# Altium PCB BugBusterMain.PcbDoc (part 3 of 6)
Units mm, origin at the board's own origin, x right, y up, seen from the top; angles counter-clockwise.
Board outline 110 x 80 mm, 6 copper layers (Top Layer, Inner Layer 1, Inner Layer 2, Inner Layer 3, Inner Layer 4, Bottom Layer), stack 1.546 mm thick; 244 components, 246 nets, 1173 pads, 1169 vias.
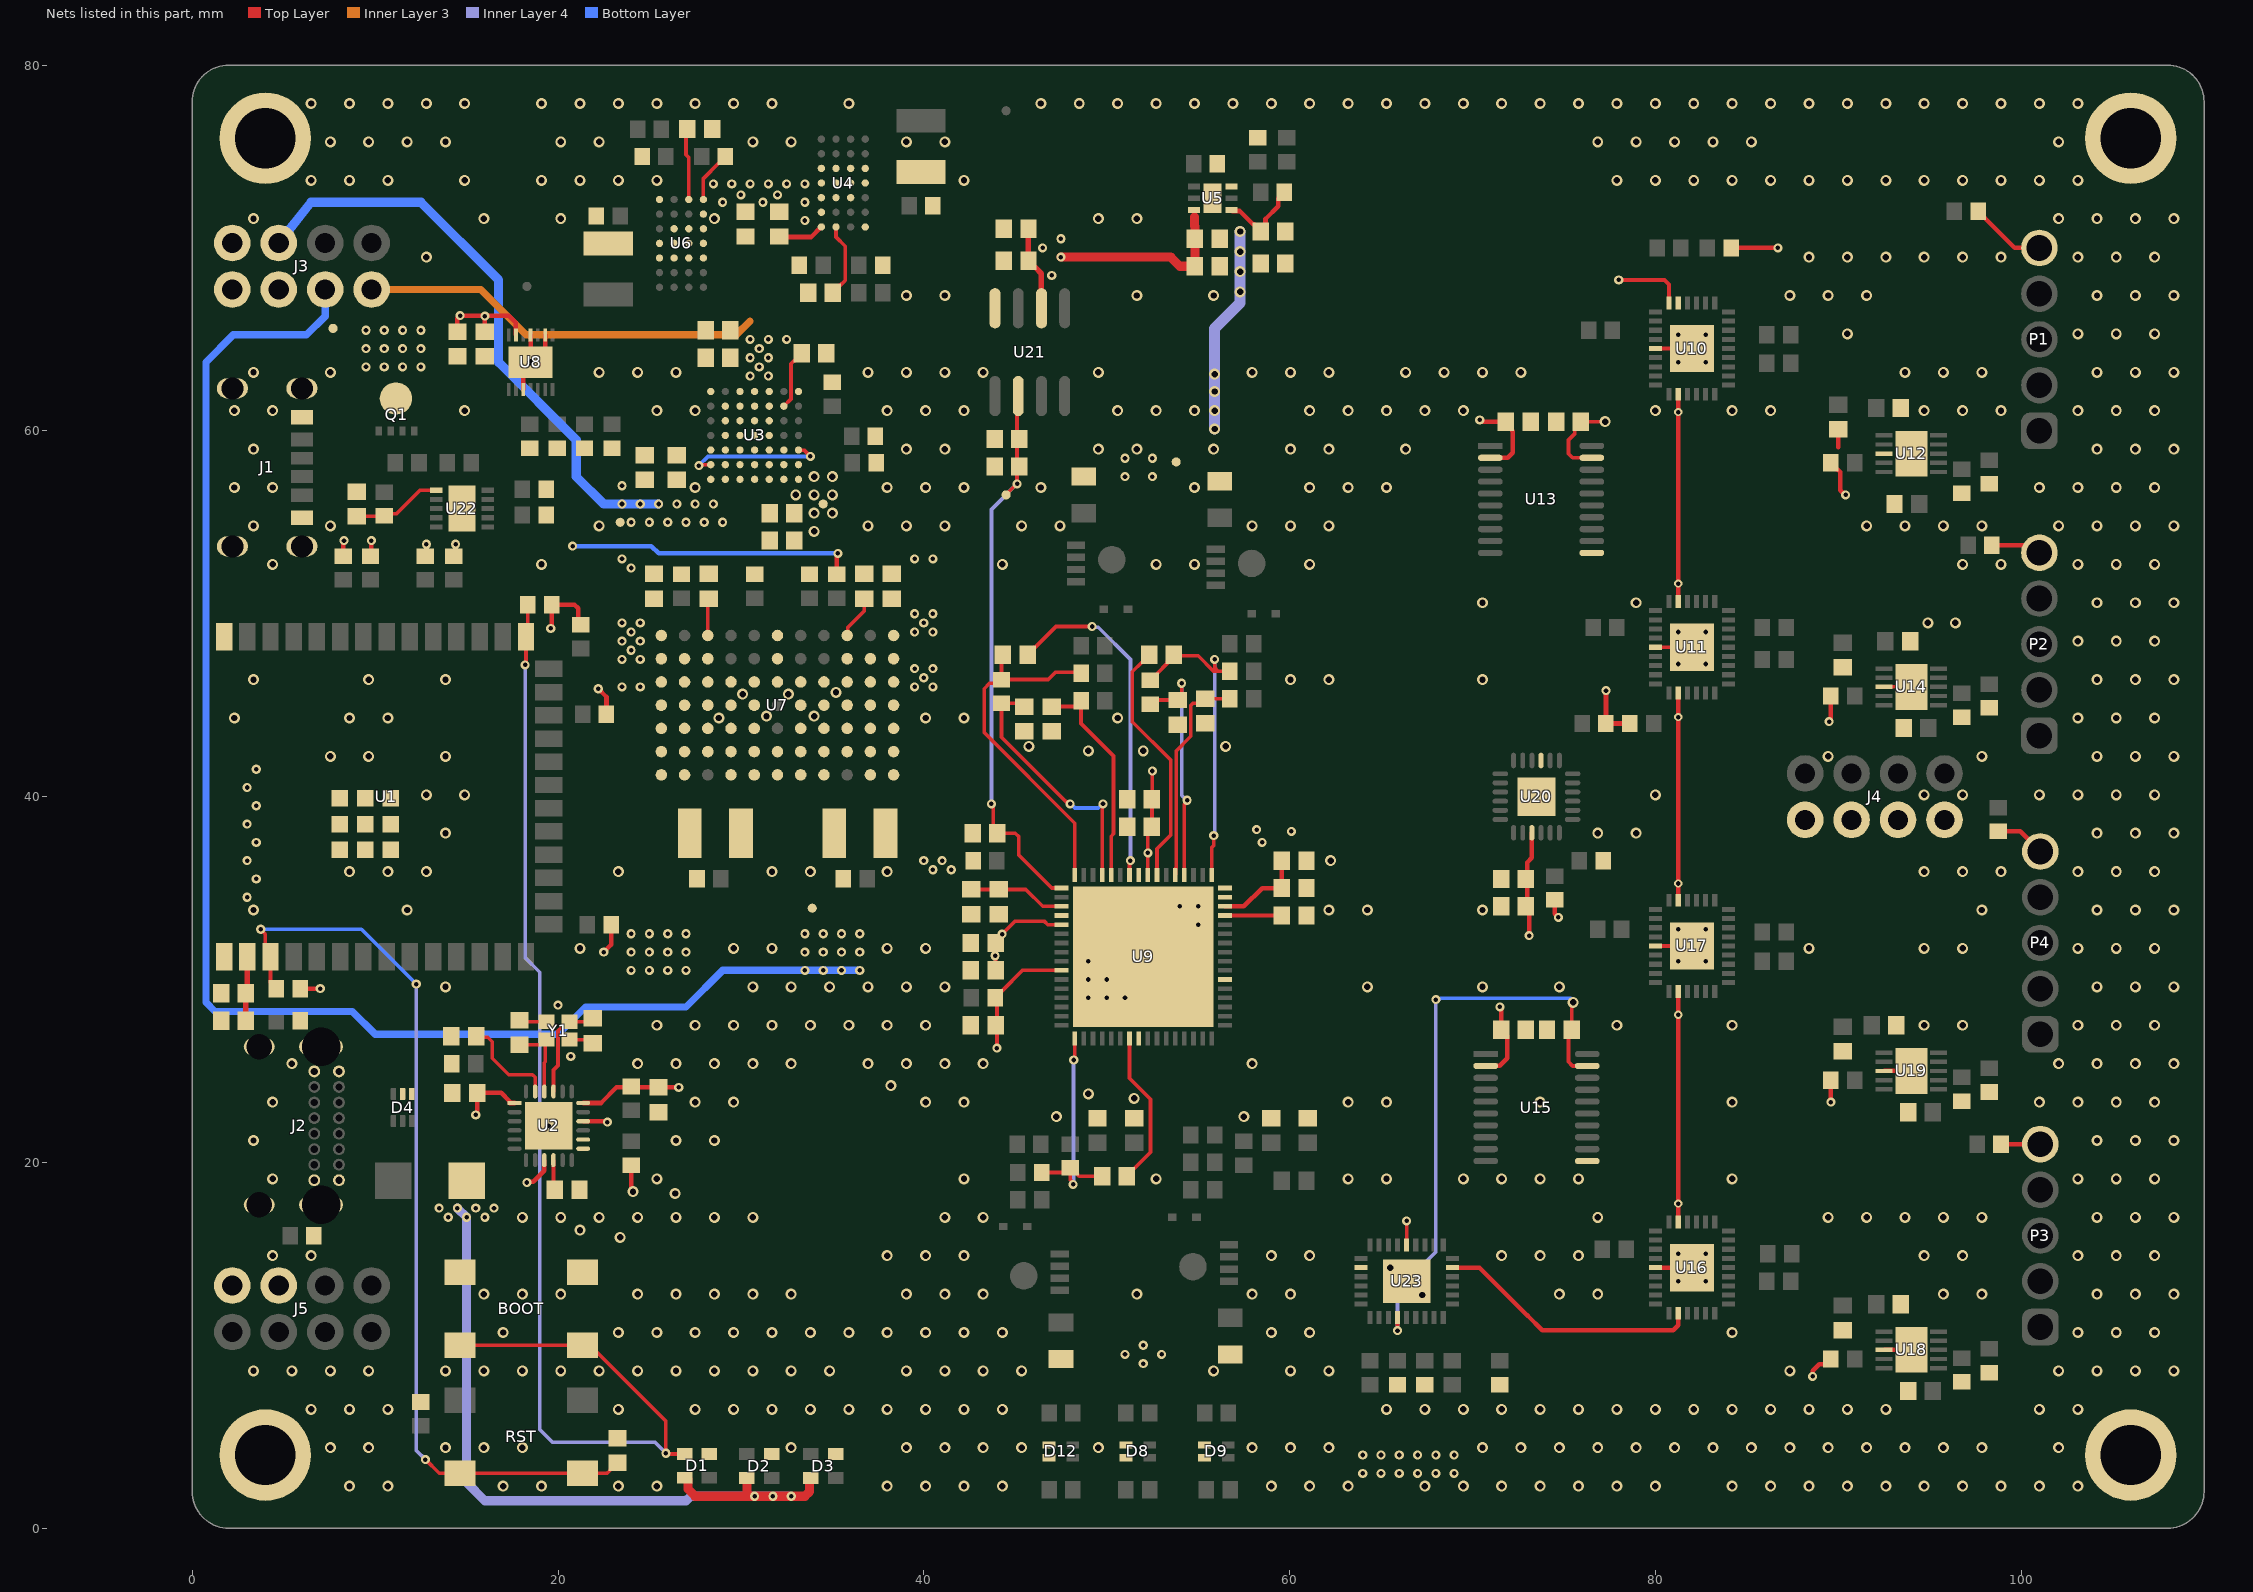
[diagram p6: the nets of this part, all layers, seen from the top]

## Part data (continued)
D4: library part CMP-04985-000003-1, "TVS DIODE 5.5V 15V 6SOT", Ambient Temperature Range High=+125°C, Ambient Temperature Range Low=-40°C, Breakdown Voltage=7V, Clamping Voltage=15V, manufacturer="Texas Instruments", Package=DRL0006A, Peak Pulse Current=2.5A, Peak Pulse Power=35W, Reverse Standoff Voltage=5.5V, Temperature="-40°C to +125°C", Automotive=No, Category=Diode, componentlink2description=Datasheet, componentlink2url=http://www.ti.com/lit/ds/symlink/tpd2e1b06.pdf, Device Class L1="Circuit Protection", Device Class L2="ESD and Circuit Protection ICs", Device Class L3=unset, Digikey Description="TVS DIODE 5.5V 15V 6SOT", Direction=Bidirectional, Height=0.6mm, Interface=I2C,USB,LVDS,Other, Lead Free=Yes, Manufacturer Part Number=TPD2E1B06DRLR, Mouser Description="ESD Suppressors / TVS Diodes 2-CH system level ESD protect device", Number Of Channels=2, Octopart=https://octopart.com/tpd2e1b06drlr-texas+instruments-30488860, RoHS=TRUE, Standoff Height=0mm, Temperature Range High=+125°C, Temperature Range Low=-40°C
D5: library part CMP-1055-00307-2, "DIODE SCHOTTKY 40V 3A SMA", Average Rectified Current=3A, Case/Package=SMA, Forward Voltage=450mV, Max Forward Surge Current (Ifsm)=100A, Max Operating Temperature=150°C, Max Repetitive Reverse Voltage (Vrrm)=40V, Max Reverse Current=15mA, Min Operating Temperature=-55°C, Package Quantity=5000, Element Configuration=Single, Forward Current=3A, Halogen Free="Halogen Free", Height=2.05mm, Lead Free="Lead Free", Length=4.57mm, Max Reverse Voltage (DC)=40V, Number of Pins=2, packaging="Tape and Reel", Peak Non-Repetitive Surge Current=100A, Radiation Hardening=No, REACH SVHC="No SVHC", RoHS Compliant=Yes, series=-, Weight=0.003739oz, Width=2.92mm
D6 D7 D10 D11: library part CMP-00278-24638172-1, "NSR0240V2T5G Diode Schottky 40V 0.25A 2-Pin SOD-523 T/R", Average Rectified Current=250mA, Capacitance=4pF, Manufacturer Lifecycle Status=ACTIVE, Max Forward Surge Current (Ifsm)=2A, Max Junction Temperature (Tj)=150°C, Max Repetitive Reverse Voltage (Vrrm)=40V, Min Operating Temperature=-55°C, Peak Non-Repetitive Surge Current=1A, Peak Reverse Current=500nA, Element Configuration=Single, Forward Current=250mA, Height=700µm, Lead Free="Lead Free", Lifecycle Status=Production, Max Operating Temperature=150°C, Max Reverse Voltage (DC)=40V, Mount="Surface Mount", NexarPartId=24638172, Number of Pins=2, packaging="Tape & Reel", Radiation Hardening=No, Reverse Recovery Time=3ns, Reverse Voltage=40V, RoHS=Compliant
D8 D9 D12: library part CMP-2000-06424-2, "LED GREEN/RED DIFFUSED 0603 SMD", Case Code (Imperial)=0603, Case Code (Metric)=1608, Color=Green, Forward Current=20mA, Forward Voltage=2.2V, Lens Color=White, Max Operating Temperature=85°C, Min Operating Temperature=-40°C, Package Quantity=1, Power Dissipation=52mW, Reverse Voltage=5V, Case/Package=0603, Depth=0.8mm, Dominant Wavelength=621nm, Height=0.5mm, Illumination Color=Green, Lead Free="Lead Free", Length=1.6mm, Lens Style=Rectangular, Lens Transparency=Diffused, Luminous Intensity=10mcd, Mount="Surface Mount", Number of Elements=2, Number of LEDs=2, Number of Pins=4, Number of Terminals=4, packaging="Tape and Reel", Power Rating=52mW, Radiation Hardening=No, REACH SVHC="No SVHC", Shape=Rectangular, Test Current=20mA, Viewing Angle=120°, Wavelength=572nm, Width=0.8mm
J1: library part CMP-245163-000004-1, "CONN RCPT TYPE C 6P SMD RA"
J2: library part CMP-196119-000001-2, "CONN RCPT USB2.0 TYPE C 24POS RA", Contact Material="Copper Alloy", Contact Plating=Gold, Gender=Receptacle, Number of Positions=16, Orientation="Right Angle", USB Standard="USB 2.0"
J3 J4 J5: "CONN RCPT 8POS 0.1 GOLD PCB", Current Rating (Amps)=3A, Insulation Color=Black, manufacturer="Harwin Inc.", Material Flammability Rating="UL94 V-0", Operating Temperature="-40°C ~ 105°C", Supplier Part Number 1=952-1789-ND, componentlink1description=Datasheet, componentlink1url=https://cdn.harwin.com/pdfs/C001XX_M20_Series_Connectors.pdf, componentlink2description="DigiKey Link", componentlink2url=http://digikey.com/product-detail/en/harwin-inc/M20-7830442/952-1789-ND/3727758, Connector Type=Receptacle, Contact Finish - Mating=Gold, Contact Finish - Post=Tin, Contact Finish Thickness - Mating=Flash, Contact Length - Post="0.118\" (3.00mm)", Contact Type="Female Socket", Fastening Type=Push-Pull, Insulation Height="0.335\" (8.51mm)", lastupdated="21/09/2022 19:04:26", Lifecycle Status=Active, Mated Stacking Heights="11.04mm, 12.63mm", Minimum Order=1, Mounting Type="Through Hole", Number of Positions=8, Number of Positions Loaded=All, Number of Rows=2, packaging=Tube, Part Number=M20-7830442, Part Status=Active, Pitch - Mating="0.100\" (2.54mm)", price=1.36, Row Spacing - Mating="0.100\" (2.54mm)", series=M20, Style="Board to Board or Cable", Supplier 1=DigiKey, Termination=Solder
P1 P2 P3 P4: library part CMP-1502-01746-3, "Terminal Block, R/A Header, 5Pos, Th Rohs Compliant: Yes", Color=Green, Current=12A, Max Operating Temperature=105°C, Min Operating Temperature=-40°C, Voltage=300V, Contact Plating=Tin, Gender=Male, Lead Pitch=2.5mm, Mount="Through Hole", Number of Levels=1, Number of Pins=5, Number of Positions=5, Number of Positions Per Level=5, packaging=Box, Pitch=2.4892mm, RoHS=Compliant, Termination=Solder
Q1: library part CMP-83955-000002-1, "MOSFET P-CH 30V 3X3 DFN", Continuous Drain Current=-24A, Drain To Source Breakdown Voltage=-30V, Drain To Source Resistance=9.2mΩ, Gate To Source Voltage=25V, Input Capacitace At Vds="1995pF @ -15V", manufacturer="Alpha & Omega Semiconductor", Max Forward Diode Voltage=-1V, Max Junction Temp=+150°C, Package=DFN3x3A_8L_EP1_P, Power Dissipation=5W, Pulse Drain Current=-82A, Temperature="-55°C to +150°C", Temperature Range Low=-55°C, Typ Forward Diode Voltage=-0.7V, Automotive=No, Category=Trans, componentlink2description=Datasheet, componentlink2url=http://www.aosmd.com/res/data_sheets/AONR21307.pdf, Depletion Mode=False, Device Class L1="Discrete Semiconductors", Device Class L2=Transistors, Device Class L3=MOSFETs, Digikey Description="MOSFET P-CH 30V 3X3 DFN", Drain To Source Voltage=-30V, Footprint Url=http://www.aosmd.com/res/packaging_information/DFN3x3A_8L_EP1_P.pdf, Gate Charge At Vgs="35nC @ -10V", Height=0.9mm, Lead Free=Yes, Manufacturer Part Number=AONR21307, Number Of Channels=1, Number Of P Channels=1, Octopart=https://octopart.com/aonr21307-alpha+%26+omega+semiconductor-96014004, Reverse Recovery Charge=20nC, Reverse Recovery Time=13.3ns, RoHS=TRUE, Rthja Max=45°C/W, Standoff Height=0mm, Temperature Range High=+150°C, Threshold Vgs Max=-2.3V, Threshold Vgs Min=-1.3V, Turn Off Delay Time=43.5ns, Turn On Delay Time=11ns
Q2 Q3 Q4 Q5: library part CMP-02550-000064-1, "MOSFET P-CH 100V 10.8A 1212-8", Continuous Drain Current=-3.8A, Drain To Source Breakdown Voltage=-100V, Drain To Source Resistance=0.11Ω, Gate To Source Voltage=20V, Input Capacitace At Vds="515pF @ -50V", manufacturer=Vishay, Max Forward Diode Voltage=-1.2V, Max Junction Temp=+150°C, Package=S16-2667-SINGLE, Power Dissipation=3.5W, Pulse Drain Current=-20A, Temperature="-55°C to +150°C", Temperature Range Low=-55°C, Typ Forward Diode Voltage=-0.8V, Automotive=No, Category=Trans, componentlink2description=Datasheet, componentlink2url=http://www.vishay.com/docs/77678/si7113adn.pdf, Depletion Mode=False, Device Class L1="Discrete Semiconductors", Device Class L2=Transistors, Device Class L3=MOSFETs, Digikey Description="MOSFET P-CH 100V 10.8A 1212-8", Drain To Source Voltage=-100V, Footprint Url=https://www.vishay.com/docs/72597/72597.pdf, Gate Charge At Vgs="10.9nC @ -10V", Height=1.17mm, Lead Free=Yes, Manufacturer Part Number=SI7113ADN-T1-GE3, Number Of Channels=1, Number Of P Channels=1, Octopart=https://octopart.com/si7113adn-t1-ge3-vishay-88182558, Reverse Recovery Charge=80nC, Reverse Recovery Time=43ns, RoHS=TRUE, Rthja Max=36°C/W, Standoff Height=0mm, Temperature Range High=+150°C, Threshold Vgs Max=-2.6V, Threshold Vgs Min=-1.1V, Transconductance=8S, Turn Off Delay Time=20ns, Turn On Delay Time=10ns
R1 R2 R10 R13 R14: library part RMCF0603FT5K10, "RES 5.1K OHM 1% 1/10W 0603", Device Package="0603 (1608 Metric)", manufacturer="Stackpole Electronics Inc", Operating Temperature="-55°C ~ 155°C", Power (Watts)="0.1W, 1/10W", Ratings=AEC-Q200, Supplier Device Package=0603, Supplier Part Number 1=RMCF0603FT5K10CT-ND, Temperature Coefficient=±100ppm/°C, Tolerance=±1%, componentlink1description=Datasheet, componentlink1url=https://www.seielect.com/catalog/sei-rmcf_rmcp.pdf, componentlink2description="DigiKey Link", componentlink2url=https://www.digikey.com/en/products/detail/stackpole-electronics-inc/RMCF0603FT5K10/1760908, Composition="Thick Film", Features="Automotive AEC-Q200", Height - Seated (Max)="0.022\" (0.55mm)", lastupdated="09/02/2024 20:43:14", Lifecycle Status=Active, Minimum Order=1, Number of Terminations=2, Package / Case="0603 (1608 Metric)", packaging=CutTape, Part Number=RMCF0603FT5K10, Part Status=Active, partid=10617, price=0.01, Resistance="5.1 kOhms", series=RMCF, Size / Dimension="0.061\" L x 0.031\" W (1.55mm x 0.80mm)", Supplier 1=DigiKey
R3 R5 R6 R7 R70 R76 R79 R81 R88 R90 R91 R93: library part SG73S1JTTD1002F, "RES 10K OHM 1% 1/5W 0603", Device Package="0603 (1608 Metric)", manufacturer="KOA Speer Electronics, Inc.", Operating Temperature="-55°C ~ 155°C", Power (Watts)="0.2W, 1/5W", Ratings=AEC-Q200, Supplier Device Package=0603, Supplier Part Number 1=2019-SG73S1JTTD1002FCT-ND, Temperature Coefficient=±100ppm/°C, Tolerance=±1%, componentlink1description=Datasheet, componentlink1url=http://www.koaspeer.com/catimages/Products/SG73S/SG73S.pdf, componentlink2description="DigiKey Link", componentlink2url=https://www.digikey.com/en/products/detail/koa-speer-electronics-inc/SG73S1JTTD1002F/10279969, Composition="Thick Film", Features="Automotive AEC-Q200, Moisture Resistant, Pulse Withstanding", Height - Seated (Max)="0.022\" (0.55mm)", lastupdated="09/02/2024 20:43:35", Lifecycle Status=Active, Minimum Order=1, Number of Terminations=2, Package / Case="0603 (1608 Metric)", packaging=TapeAndReel, Part Number=SG73S1JTTD1002F, Part Status=Active, partid=5386, price=0.01, Resistance="10 kOhms", series=SG73S, Size / Dimension="0.063\" L x 0.031\" W (1.60mm x 0.80mm)", Supplier 1=DigiKey
R4 R8: library part ESR03EZPF10R0, "RES SMD 10 OHM 1% 1/4W 0603", Device Package="0603 (1608 Metric)", manufacturer="Rohm Semiconductor", Operating Temperature="-55°C ~ 155°C", Power (Watts)="0.25W, 1/4W", Ratings=AEC-Q200, Supplier Device Package=0603, Supplier Part Number 1=RHM10.0ADCT-ND, Temperature Coefficient=±100ppm/°C, Tolerance=±1%, componentlink1description=Datasheet, componentlink1url=https://www.rohm.com/datasheet/ESR01MZPF/esr-e, componentlink2description="DigiKey Link", componentlink2url=https://www.digikey.com/en/products/detail/rohm-semiconductor/ESR03EZPF10R0/1983431, Composition="Thick Film", Features="Automotive AEC-Q200, Pulse Withstanding", Height - Seated (Max)="0.022\" (0.55mm)", lastupdated="09/02/2024 20:43:34", Lifecycle Status=Active, Minimum Order=1, Number of Terminations=2, Package / Case="0603 (1608 Metric)", packaging=TapeAndReel, Part Number=ESR03EZPF10R0, Part Status=Active, partid=5471, price=0.02, Resistance="10 Ohms", series=ESR, Size / Dimension="0.063\" L x 0.031\" W (1.60mm x 0.80mm)", Supplier 1=DigiKey
R9: library part RMCF0603FT49K9, "RES 49.9K OHM 1% 1/10W 0603", Device Package="0603 (1608 Metric)", manufacturer="Stackpole Electronics Inc", Operating Temperature="-55°C ~ 155°C", Power (Watts)="0.1W, 1/10W", Ratings=AEC-Q200, Supplier Device Package=0603, Supplier Part Number 1=RMCF0603FT49K9CT-ND, Temperature Coefficient=±100ppm/°C, Tolerance=±1%, componentlink1description=Datasheet, componentlink1url=https://www.seielect.com/catalog/sei-rmcf_rmcp.pdf, componentlink2description="DigiKey Link", componentlink2url=https://www.digikey.com/en/products/detail/stackpole-electronics-inc/RMCF0603FT49K9/1760907, Composition="Thick Film", Features="Automotive AEC-Q200", Height - Seated (Max)="0.022\" (0.55mm)", lastupdated="09/02/2024 20:43:14", Lifecycle Status=Active, Minimum Order=1, Number of Terminations=2, Package / Case="0603 (1608 Metric)", packaging=CutTape, Part Number=RMCF0603FT49K9, Part Status=Active, partid=10596, price=0.01, Resistance="49.9 kOhms", series=RMCF, Size / Dimension="0.061\" L x 0.031\" W (1.55mm x 0.80mm)", Supplier 1=DigiKey
R11: library part RC0603FR-0722K6L, "RES 22.6K OHM 1% 1/10W 0603", Device Package="0603 (1608 Metric)", manufacturer=Yageo, Operating Temperature="-55°C ~ 155°C", Power (Watts)="0.1W, 1/10W", Supplier Device Package=0603, Supplier Part Number 1=311-22.6KHRCT-ND, Temperature Coefficient=±100ppm/°C, Tolerance=±1%, componentlink1description=Datasheet, componentlink1url=https://www.yageo.com/upload/media/product/productsearch/datasheet/rchip/PYu-RC_Group_51_RoHS_L_10.pdf, componentlink2description="DigiKey Link", componentlink2url=https://www.digikey.com/en/products/detail/yageo/RC0603FR-0722K6L/727060, Composition="Thick Film", Features="Moisture Resistant", Height - Seated (Max)="0.022\" (0.55mm)", lastupdated="09/02/2024 20:43:06", Lifecycle Status=Active, Minimum Order=1, Number of Terminations=2, Package / Case="0603 (1608 Metric)", packaging=CutTape, Part Number=RC0603FR-0722K6L, Part Status=Active, partid=12540, price=0.01, Resistance="22.6 kOhms", series=RC_L, Size / Dimension="0.063\" L x 0.031\" W (1.60mm x 0.80mm)", Supplier 1=DigiKey
R12: library part HCJ0603ZT0R00, "RES 0 OHM JUMPER 1/4W 0603", Device Package="0603 (1608 Metric)", manufacturer="Stackpole Electronics Inc", Operating Temperature="-55°C ~ 155°C", Power (Watts)="0.25W, 1/4W", Ratings=AEC-Q200, Resistance="0 Ohms", Supplier Device Package=0603, Supplier Part Number 1=HCJ0603ZT0R00CT-ND, Tolerance=Jumper, componentlink1description=Datasheet, componentlink1url=https://www.seielect.com/catalog/sei-hcj.pdf, componentlink2description="DigiKey Link", componentlink2url=https://www.digikey.com/en/products/detail/stackpole-electronics-inc/HCJ0603ZT0R00/4357660, Composition="Metal Foil", Features="Automotive AEC-Q200", Height - Seated (Max)="0.018\" (0.45mm)", lastupdated="09/02/2024 20:43:15", Lifecycle Status=Active, Minimum Order=1, Number of Terminations=2, Package / Case="0603 (1608 Metric)", packaging=TapeAndReel, Part Number=HCJ0603ZT0R00, Part Status=Active, partid=10189, price=0.06, series=HCJ, Size / Dimension="0.061\" L x 0.031\" W (1.55mm x 0.80mm)", Supplier 1=DigiKey
R15 R16 R19 R26 R31 R96 R103 R109 R110 R111 R112: library part SG73P1JTTD1003F, "RES 100K OHM 1% 1/3W 0603", Device Package="0603 (1608 Metric)", manufacturer="KOA Speer Electronics, Inc.", Operating Temperature="-55°C ~ 155°C", Power (Watts)="0.333W, 1/3W", Ratings=AEC-Q200, Supplier Device Package=0603, Supplier Part Number 1=2019-SG73P1JTTD1003FCT-ND, Temperature Coefficient=±100ppm/°C, Tolerance=±1%, componentlink1description=Datasheet, componentlink1url=https://www.koaspeer.com/pdfs/SG73P.pdf, componentlink2description="DigiKey Link", componentlink2url=https://www.digikey.com/en/products/detail/koa-speer-electronics-inc/SG73P1JTTD1003F/10188341, Composition="Thick Film", Features="Automotive AEC-Q200, Pulse Withstanding", Height - Seated (Max)="0.022\" (0.55mm)", lastupdated="09/02/2024 20:40:28", Lifecycle Status=Active, Minimum Order=1, Number of Terminations=2, Package / Case="0603 (1608 Metric)", packaging=TapeAndReel, Part Number=SG73P1JTTD1003F, partid=83707, price=0.01, Resistance="100 kOhms", series=SG73P, Size / Dimension="0.063\" L x 0.031\" W (1.60mm x 0.80mm)", Supplier 1=DigiKey
R17: library part CRCW060312K0FKEAHP, "RES SMD 12K OHM 1% 1/3W 0603", Device Package="0603 (1608 Metric)", manufacturer="Vishay Dale", Operating Temperature="-55°C ~ 155°C", Power (Watts)="0.333W, 1/3W", Ratings=AEC-Q200, Supplier Device Package=0603, Supplier Part Number 1=541-12.0KSCT-ND, Temperature Coefficient=±100ppm/°C, Tolerance=±1%, componentlink1description=Datasheet, componentlink1url=http://www.vishay.com/docs/20043/crcwhpe3.pdf, componentlink2description="DigiKey Link", componentlink2url=https://www.digikey.com/en/products/detail/vishay-dale/CRCW060312K0FKEAHP/2226294, Composition="Thick Film", Features="Automotive AEC-Q200, Pulse Withstanding", Height - Seated (Max)="0.022\" (0.55mm)", lastupdated="09/02/2024 20:43:11", Lifecycle Status=Active, Minimum Order=1, Number of Terminations=2, Package / Case="0603 (1608 Metric)", packaging=TapeAndReel, Part Number=CRCW060312K0FKEAHP, Part Status=Active, partid=11340, price=0.01, Resistance="12 kOhms", series=CRCW-HP, Size / Dimension="0.063\" L x 0.033\" W (1.60mm x 0.85mm)", Supplier 1=DigiKey
R18: library part KTR03EZPF2202, "RES SMD 22K OHM 1% 1/10W 0603", Device Package="0603 (1608 Metric)", manufacturer="Rohm Semiconductor", Operating Temperature="-55°C ~ 155°C", Power (Watts)="0.1W, 1/10W", Ratings=AEC-Q200, Supplier Device Package=0603, Supplier Part Number 1=RHM22KAYCT-ND, Temperature Coefficient=±100ppm/°C, Tolerance=±1%, componentlink1description=Datasheet, componentlink1url=https://www.rohm.com/datasheet/KTR03EZPF/ktr-e, componentlink2description="DigiKey Link", componentlink2url=https://www.digikey.com/en/products/detail/rohm-semiconductor/KTR03EZPF2202/4051603, Composition="Thick Film", Features="Automotive AEC-Q200, High Voltage", Height - Seated (Max)="0.022\" (0.55mm)", lastupdated="09/02/2024 20:43:35", Lifecycle Status=Active, Minimum Order=1, Number of Terminations=2, Package / Case="0603 (1608 Metric)", packaging=TapeAndReel, Part Number=KTR03EZPF2202, Part Status=Active, partid=5323, price=0.02, Resistance="22 kOhms", series=KTR, Size / Dimension="0.063\" L x 0.031\" W (1.60mm x 0.80mm)", Supplier 1=DigiKey
R20 R27: library part AC0603FR-0745K3L, "RES SMD 45.3K OHM 1% 1/10W 0603", Device Package="0603 (1608 Metric)", manufacturer=Yageo, Operating Temperature="-55°C ~ 155°C", Power (Watts)="0.1W, 1/10W", Ratings=AEC-Q200, Supplier Device Package=0603, Supplier Part Number 1=13-AC0603FR-0745K3LCT-ND, Temperature Coefficient=±100ppm/°C, Tolerance=±1%, componentlink1description=Datasheet, componentlink1url=https://www.yageo.com/upload/media/product/productsearch/datasheet/rchip/PYu-AC_51_RoHS_L_8.pdf, componentlink2description="DigiKey Link", componentlink2url=https://www.digikey.com/en/products/detail/yageo/AC0603FR-0745K3L/5896132, Composition="Thick Film", Features="Automotive AEC-Q200, Moisture Resistant", Height - Seated (Max)="0.022\" (0.55mm)", lastupdated="09/02/2024 20:41:10", Lifecycle Status=Active, Minimum Order=1, Number of Terminations=2, Package / Case="0603 (1608 Metric)", packaging=CutTape, Part Number=AC0603FR-0745K3L, Part Status=Active, partid=67933, price=0.01, Resistance="45.3 kOhms", series=AC, Size / Dimension="0.063\" L x 0.031\" W (1.60mm x 0.80mm)", Supplier 1=DigiKey
R21: library part RMCF0603FT45K3, "RES 45.3K OHM 1% 1/10W 0603", Device Package="0603 (1608 Metric)", manufacturer="Stackpole Electronics Inc", Operating Temperature="-55°C ~ 155°C", Power (Watts)="0.1W, 1/10W", Ratings=AEC-Q200, Supplier Device Package=0603, Supplier Part Number 1=RMCF0603FT45K3CT-ND, Temperature Coefficient=±100ppm/°C, Tolerance=±1%, componentlink1description=Datasheet, componentlink1url=https://www.seielect.com/catalog/sei-rmcf_rmcp.pdf, componentlink2description="DigiKey Link", componentlink2url=https://www.digikey.com/en/products/detail/stackpole-electronics-inc/RMCF0603FT45K3/1761270, Composition="Thick Film", Features="Automotive AEC-Q200", Height - Seated (Max)="0.022\" (0.55mm)", lastupdated="09/02/2024 20:43:13", Lifecycle Status=Active, Minimum Order=1, Number of Terminations=2, Package / Case="0603 (1608 Metric)", packaging=CutTape, Part Number=RMCF0603FT45K3, Part Status=Active, partid=10832, price=0.01, Resistance="45.3 kOhms", series=RMCF, Size / Dimension="0.061\" L x 0.031\" W (1.55mm x 0.80mm)", Supplier 1=DigiKey
R22 R107 R108: library part CRCW060334K8FKEA, "RES SMD 34.8K OHM 1% 1/10W 0603", Device Package="0603 (1608 Metric)", manufacturer="Vishay Dale", Operating Temperature="-55°C ~ 155°C", Power (Watts)="0.1W, 1/10W", Ratings=AEC-Q200, Supplier Device Package=0603, Supplier Part Number 1=541-34.8KHCT-ND, Temperature Coefficient=±100ppm/°C, Tolerance=±1%, componentlink1description=Datasheet, componentlink1url=http://www.vishay.com/docs/20035/dcrcwe3.pdf, componentlink2description="DigiKey Link", componentlink2url=https://www.digikey.com/en/products/detail/vishay-dale/CRCW060334K8FKEA/1174842, Composition="Thick Film", Features="Automotive AEC-Q200", Height - Seated (Max)="0.020\" (0.50mm)", lastupdated="09/02/2024 20:43:05", Lifecycle Status=Active, Minimum Order=1, Number of Terminations=2, Package / Case="0603 (1608 Metric)", packaging=TapeAndReel, Part Number=CRCW060334K8FKEA, Part Status=Active, partid=12662, price=0.01, Resistance="34.8 kOhms", series=CRCW, Size / Dimension="0.061\" L x 0.033\" W (1.55mm x 0.85mm)", Supplier 1=DigiKey
R23: library part CPF0603F78K7C1, "RES SMD 78.7K OHM 1% 1/16W 0603", Device Package="0603 (1608 Metric)", manufacturer="TE Connectivity Passive Product", Operating Temperature="-55°C ~ 155°C", Power (Watts)="0.063W, 1/16W", Supplier Device Package=0603, Supplier Part Number 1=A102318CT-ND, Temperature Coefficient=±50ppm/°C, Tolerance=±1%, componentlink1description=Datasheet, componentlink1url=https://www.te.com/commerce/DocumentDelivery/DDEController?Action=srchrtrv&DocNm=1773200&DocType=DS&DocLang=English, componentlink2description="DigiKey Link", componentlink2url=https://www.digikey.com/en/products/detail/te-connectivity-passive-product/CPF0603F78K7C1/2384668, Composition="Thin Film", Height - Seated (Max)="0.022\" (0.55mm)", lastupdated="09/02/2024 20:43:28", Lifecycle Status=Active, Minimum Order=1, Number of Terminations=2, Package / Case="0603 (1608 Metric)", packaging=TapeAndReel, Part Number=CPF0603F78K7C1, Part Status=Active, partid=7055, price=0.02, Resistance="78.7 kOhms", series="CPF, Neohm", Size / Dimension="0.061\" L x 0.031\" W (1.55mm x 0.80mm)", Supplier 1=DigiKey
R24 R28 R50 R51 R65 R66 R67 R77 R78 R94 R95 R104: library part MCT0603MZ0000ZP500, "RES 0 OHM JUMPER 1/8W 0603", Device Package="0603 (1608 Metric)", manufacturer="Vishay Beyschlag", Operating Temperature="-55°C ~ 155°C", Power (Watts)="0.125W, 1/8W", Ratings=AEC-Q200, Supplier Device Package=0603, Supplier Part Number 1=749-1745-1-ND, Tolerance=Jumper, componentlink1description=Datasheet, componentlink1url=http://www.vishay.com/docs/28760/mcat_pro.pdf, componentlink2description="DigiKey Link", componentlink2url=http://digikey.com/product-detail/en/vishay-beyschlag/MCT0603MZ0000ZP500/749-1745-1-ND/7348053, Composition="Thin Film", Features="Anti-Sulfur, Automotive AEC-Q200", Height - Seated (Max)="0.022\" (0.55mm)", lastupdated="14/02/2022 15:05:22", Lifecycle Status=Active, Minimum Order=1, Number of Terminations=2, Package / Case="0603 (1608 Metric)", packaging=TapeAndReel, Part Number=MCT0603MZ0000ZP500, Part Status=Active, partid=10258, price=0.04, series="MCT AT - Professional", Size / Dimension="0.061\" L x 0.033\" W (1.55mm x 0.85mm)", Supplier 1=DigiKey
R25 R29: library part RN73R1JTTD4172F10, "RES 41.7K OHM 1% 1/10W 0603", Device Package="0603 (1608 Metric)", manufacturer="KOA Speer Electronics, Inc.", Operating Temperature="-55°C ~ 155°C", Power (Watts)="0.1W, 1/10W", Ratings=AEC-Q200, Supplier Device Package=0603, Supplier Part Number 1=2019-RN73R1JTTD4172F10CT-ND, Temperature Coefficient=±10ppm/°C, Tolerance=±1%, componentlink1description=Datasheet, componentlink1url=https://media.digikey.com/pdf/Data%20Sheets/KOA%20Speer/RN73R_Type_DS.pdf, componentlink2description="DigiKey Link", componentlink2url=https://www.digikey.com/en/products/detail/koa-speer-electronics-inc/RN73R1JTTD4172F10/10017113, Composition="Thin Film", Features="Automotive AEC-Q200, Moisture Resistant", Height - Seated (Max)="0.022\" (0.55mm)", lastupdated="09/02/2024 20:41:25", Lifecycle Status=Active, Minimum Order=1, Number of Terminations=2, Package / Case="0603 (1608 Metric)", packaging=TapeAndReel, Part Number=RN73R1JTTD4172F10, Part Status=Active, partid=62816, price=0.08, Resistance="41.7 kOhms", series=RN73R, Size / Dimension="0.063\" L x 0.031\" W (1.60mm x 0.80mm)", Supplier 1=DigiKey
R30: library part RC0603FR-07165KL, "RES 165K OHM 1% 1/10W 0603", Device Package="0603 (1608 Metric)", manufacturer=Yageo, Operating Temperature="-55°C ~ 155°C", Power (Watts)="0.1W, 1/10W", Supplier Device Package=0603, Supplier Part Number 1=311-165KHRCT-ND, Temperature Coefficient=±100ppm/°C, Tolerance=±1%, componentlink1description=Datasheet, componentlink1url=https://www.yageo.com/upload/media/product/productsearch/datasheet/rchip/PYu-RC_Group_51_RoHS_L_10.pdf, componentlink2description="DigiKey Link", componentlink2url=https://www.digikey.com/en/products/detail/yageo/RC0603FR-07165KL/726977, Composition="Thick Film", Features="Moisture Resistant", Height - Seated (Max)="0.022\" (0.55mm)", lastupdated="09/02/2024 20:43:06", Lifecycle Status=Active, Minimum Order=1, Number of Terminations=2, Package / Case="0603 (1608 Metric)", packaging=CutTape, Part Number=RC0603FR-07165KL, Part Status=Active, partid=12456, price=0.01, Resistance="165 kOhms", series=RC_L, Size / Dimension="0.063\" L x 0.031\" W (1.60mm x 0.80mm)", Supplier 1=DigiKey
R32 R34 R35 R36: library part AC0603FR-07154KL, "RES SMD 154K OHM 1% 1/10W 0603", Device Package="0603 (1608 Metric)", manufacturer=Yageo, Operating Temperature="-55°C ~ 155°C", Power (Watts)="0.1W, 1/10W", Ratings=AEC-Q200, Supplier Device Package=0603, Supplier Part Number 1=13-AC0603FR-07154KLCT-ND, Temperature Coefficient=±100ppm/°C, Tolerance=±1%, componentlink1description=Datasheet, componentlink1url=https://media.digikey.com/pdf/Data%20Sheets/Yageo%20PDFs/AC%20Series,%20Automotive.pdf, componentlink2description="DigiKey Link", componentlink2url=https://www.digikey.com/en/products/detail/yageo/AC0603FR-07154KL/5895797, Composition="Thick Film", Features="Automotive AEC-Q200, Moisture Resistant", Height - Seated (Max)="0.022\" (0.55mm)", lastupdated="09/02/2024 20:40:39", Lifecycle Status=Active, Minimum Order=1, Number of Terminations=2, Package / Case="0603 (1608 Metric)", packaging=CutTape, Part Number=AC0603FR-07154KL, partid=79462, price=0.01, Resistance="154 kOhms", series=AC, Size / Dimension="0.063\" L x 0.031\" W (1.60mm x 0.80mm)", Supplier 1=DigiKey
R33 R38: library part RC0603FR-0773K2L, "RES 73.2K OHM 1% 1/10W 0603", Device Package="0603 (1608 Metric)", manufacturer=Yageo, Operating Temperature="-55°C ~ 155°C", Power (Watts)="0.1W, 1/10W", Supplier Device Package=0603, Supplier Part Number 1=311-73.2KHRCT-ND, Temperature Coefficient=±100ppm/°C, Tolerance=±1%, componentlink1description=Datasheet, componentlink1url=https://www.yageo.com/upload/media/product/productsearch/datasheet/rchip/PYu-RC_Group_51_RoHS_L_10.pdf, componentlink2description="DigiKey Link", componentlink2url=https://www.digikey.com/en/products/detail/yageo/RC0603FR-0773K2L/727374, Composition="Thick Film", Features="Moisture Resistant", Height - Seated (Max)="0.022\" (0.55mm)", lastupdated="09/02/2024 20:43:06", Lifecycle Status=Active, Minimum Order=1, Number of Terminations=2, Package / Case="0603 (1608 Metric)", packaging=CutTape, Part Number=RC0603FR-0773K2L, Part Status=Active, partid=12298, price=0.01, Resistance="73.2 kOhms", series=RC_L, Size / Dimension="0.063\" L x 0.031\" W (1.60mm x 0.80mm)", Supplier 1=DigiKey
R37: library part RK73H1JTTD1783F, "RES 178K OHM 1% 1/10W 0603", Device Package="0603 (1608 Metric)", manufacturer="KOA Speer Electronics, Inc.", Operating Temperature="-55°C ~ 155°C", Power (Watts)="0.1W, 1/10W", Ratings=AEC-Q200, Supplier Device Package=0603, Supplier Part Number 1=2019-RK73H1JTTD1783FCT-ND, Temperature Coefficient=±100ppm/°C, Tolerance=±1%, componentlink1description=Datasheet, componentlink1url=http://www.koaspeer.com/catimages/Products/RK73H/RK73H.pdf, componentlink2description="DigiKey Link", componentlink2url=https://www.digikey.com/en/products/detail/koa-speer-electronics-inc/RK73H1JTTD1783F/9845129, Composition="Thick Film", Features="Automotive AEC-Q200, Moisture Resistant", Height - Seated (Max)="0.022\" (0.55mm)", lastupdated="09/02/2024 20:43:21", Lifecycle Status=Active, Minimum Order=1, Number of Terminations=2, Package / Case="0603 (1608 Metric)", packaging=CutTape, Part Number=RK73H1JTTD1783F, Part Status=Active, partid=8649, price=0.01, Resistance="178 kOhms", series=RK73H, Size / Dimension="0.063\" L x 0.031\" W (1.60mm x 0.80mm)", Supplier 1=DigiKey
R39 R40 R52 R53: library part KDV08DR150ET, "RES 0.15 OHM 0.5% 1/4W 0805", Device Package="0805 (2012 Metric)", manufacturer=Ohmite, Operating Temperature="-55°C ~ 155°C", Power (Watts)="0.25W, 1/4W", Supplier Device Package=0805, Supplier Part Number 1=273-KDV08DR150ETCT-ND, Temperature Coefficient=±50ppm/°C, Tolerance=±0.5%, componentlink1description=Datasheet, componentlink1url=https://www.ohmite.com/assets/docs/res_kdv.pdf?r=false, componentlink2description="DigiKey Link", componentlink2url=https://www.digikey.com/en/products/detail/ohmite/KDV08DR150ET/10476573, Composition="Metal Film", Features="Current Sense", Height - Seated (Max)="0.026\" (0.65mm)", lastupdated="03/06/2024 19:48:49", Lifecycle Status=Active, Minimum Order=1, Number of Terminations=2, Package / Case="0805 (2012 Metric)", packaging=TapeAndReel, Part Number=KDV08DR150ET, Part Status=Active, partid=3876, price=0.03, Resistance="150 mOhms", series=KDV, Size / Dimension="0.079\" L x 0.049\" W (2.00mm x 1.25mm)", Supplier 1=DigiKey
R41: library part AC0603FR-132KL, "RES 2K OHM 1% 1/10W 0603", Device Package="0603 (1608 Metric)", manufacturer=Yageo, Operating Temperature="-55°C ~ 155°C", Power (Watts)="0.1W, 1/10W", Ratings=AEC-Q200, Supplier Device Package=0603, Supplier Part Number 1=13-AC0603FR-132KLCT-ND, Temperature Coefficient=±100ppm/°C, Tolerance=±1%, componentlink1description=Datasheet, componentlink1url=https://www.yageo.com/upload/media/product/productsearch/datasheet/rchip/PYu-AC_51_RoHS_L_10.pdf, componentlink2description="DigiKey Link", componentlink2url=https://www.digikey.com/en/products/detail/yageo/AC0603FR-132KL/17011825, Composition="Thick Film", Features="Automotive AEC-Q200, Moisture Resistant", Height - Seated (Max)="0.022\" (0.55mm)", lastupdated="09/02/2024 20:40:30", Lifecycle Status=Active, Minimum Order=1, Number of Terminations=2, Package / Case="0603 (1608 Metric)", packaging=CutTape, Part Number=AC0603FR-132KL, partid=83869, price=0.01, Resistance="2 kOhms", series=AC, Size / Dimension="0.063\" L x 0.031\" W (1.60mm x 0.80mm)", Supplier 1=DigiKey
R42 R43 R46 R47 R48 R49 R54 R55 R59 R60 R61 R62 R68 R69 R71 R72 R74 R75 R82 R83 R84 R85 R86 R87: library part ERJ-S03F2001V, "RES SMD 2K OHM 1% 1/10W 0603", Device Package="0603 (1608 Metric)", manufacturer="Panasonic Electronic Components", Operating Temperature="-55°C ~ 155°C", Power (Watts)="0.1W, 1/10W", Ratings=AEC-Q200, Supplier Device Package=0603, Supplier Part Number 1=10-ERJ-S03F2001VCT-ND, Temperature Coefficient=±100ppm/°C, Tolerance=±1%, componentlink1description=Datasheet, componentlink1url=https://industrial.panasonic.com/ww/products/pt/anti-sulfurated-chip-resistors/models/ERJS03F2001V, componentlink2description="DigiKey Link", componentlink2url=https://www.digikey.com/en/products/detail/panasonic-electronic-components/ERJ-S03F2001V/1162048, Composition="Thick Film", Features="Anti-Sulfur, Automotive AEC-Q200", Height - Seated (Max)="0.022\" (0.55mm)", lastupdated="09/02/2024 20:40:33", Lifecycle Status=Active, Minimum Order=1, Number of Terminations=2, Package / Case="0603 (1608 Metric)", packaging=TapeAndReel, Part Number=ERJ-S03F2001V, partid=82187, price=0.02, Resistance="2 kOhms", series=ERJ-S03, Size / Dimension="0.063\" L x 0.031\" W (1.60mm x 0.80mm)", Supplier 1=DigiKey
R44 R45 R57 R58: library part RT0603BRD0712RL, "RES SMD 12 OHM 0.1% 1/10W 0603", Device Package="0603 (1608 Metric)", manufacturer=Yageo, Operating Temperature="-55°C ~ 155°C", Power (Watts)="0.1W, 1/10W", Supplier Device Package=0603, Supplier Part Number 1=13-RT0603BRD0712RLCT-ND, Temperature Coefficient=±25ppm/°C, Tolerance=±0.1%, componentlink1description=Datasheet, componentlink1url=https://www.yageo.com/upload/media/product/productsearch/datasheet/rchip/PYu-RT_1-to-0.01_RoHS_L_12.pdf, componentlink2description="DigiKey Link", componentlink2url=https://www.digikey.com/en/products/detail/yageo/RT0603BRD0712RL/1072233, Composition="Thin Film", Height - Seated (Max)="0.022\" (0.55mm)", lastupdated="09/02/2024 20:41:27", Lifecycle Status=Active, Minimum Order=1, Number of Terminations=2, Package / Case="0603 (1608 Metric)", packaging=TapeAndReel, Part Number=RT0603BRD0712RL, Part Status=Active, partid=63018, price=0.03, Resistance="12 Ohms", series=RT, Size / Dimension="0.063\" L x 0.031\" W (1.60mm x 0.80mm)", Supplier 1=DigiKey
R56 R63 R64: library part SG73P1JTTD1003F, "RES 100K OHM 1% 1/3W 0603", Device Package="0603 (1608 Metric)", manufacturer="KOA Speer Electronics, Inc.", Operating Temperature="-55°C ~ 155°C", Power (Watts)="0.333W, 1/3W", Ratings=AEC-Q200, Resistance="100 kOhms", Supplier Device Package=0603, Supplier Part Number 1=2019-SG73P1JTTD1003FCT-ND, Temperature Coefficient=±100ppm/°C, Tolerance=±1%, componentlink1description=Datasheet, componentlink1url=https://www.koaspeer.com/pdfs/SG73P.pdf, componentlink2description="DigiKey Link", componentlink2url=https://www.digikey.com/en/products/detail/koa-speer-electronics-inc/SG73P1JTTD1003F/10188341, Composition="Thick Film", Features="Automotive AEC-Q200, Pulse Withstanding", Height - Seated (Max)="0.022\" (0.55mm)", lastupdated="09/02/2024 20:40:28", Lifecycle Status=Active, Minimum Order=1, Number of Terminations=2, Package / Case="0603 (1608 Metric)", packaging=TapeAndReel, Part Number=SG73P1JTTD1003F, partid=83707, price=0.01, series=SG73P, Size / Dimension="0.063\" L x 0.031\" W (1.60mm x 0.80mm)", Supplier 1=DigiKey
R73 R80 R89 R92: library part CPF0603F11KC1, "RES SMD 11K OHM 1% 1/16W 0603", Device Package="0603 (1608 Metric)", manufacturer="TE Connectivity Passive Product", Operating Temperature="-55°C ~ 155°C", Power (Watts)="0.063W, 1/16W", Supplier Device Package=0603, Supplier Part Number 1=A102207CT-ND, Temperature Coefficient=±50ppm/°C, Tolerance=±1%, componentlink1description=Datasheet, componentlink1url=https://www.te.com/commerce/DocumentDelivery/DDEController?Action=srchrtrv&DocNm=1773200&DocType=DS&DocLang=English, componentlink2description="DigiKey Link", componentlink2url=https://www.digikey.com/en/products/detail/te-connectivity-passive-product/CPF0603F11KC1/2384575, Composition="Thin Film", Height - Seated (Max)="0.022\" (0.55mm)", lastupdated="09/02/2024 20:42:52", Lifecycle Status=Active, Minimum Order=1, Number of Terminations=2, Package / Case="0603 (1608 Metric)", packaging=TapeAndReel, Part Number=CPF0603F11KC1, Part Status=Active, partid=16206, price=0.02, Resistance="11 kOhms", series="CPF, Neohm", Size / Dimension="0.061\" L x 0.031\" W (1.55mm x 0.80mm)", Supplier 1=DigiKey
R97 R98 R99: library part CRCW0603133RFKEA, "RES SMD 133 OHM 1% 1/10W 0603", Device Package="0603 (1608 Metric)", manufacturer="Vishay Dale", Operating Temperature="-55°C ~ 155°C", Power (Watts)="0.1W, 1/10W", Ratings=AEC-Q200, Supplier Device Package=0603, Supplier Part Number 1=541-133HCT-ND, Temperature Coefficient=±100ppm/°C, Tolerance=±1%, componentlink1description=Datasheet, componentlink1url=http://www.vishay.com/docs/20035/dcrcwe3.pdf, componentlink2description="DigiKey Link", componentlink2url=https://www.digikey.com/en/products/detail/vishay-dale/CRCW0603133RFKEA/1174567, Composition="Thick Film", Features="Automotive AEC-Q200", Height - Seated (Max)="0.020\" (0.50mm)", lastupdated="09/02/2024 20:43:24", Lifecycle Status=Active, Minimum Order=1, Number of Terminations=2, Package / Case="0603 (1608 Metric)", packaging=TapeAndReel, Part Number=CRCW0603133RFKEA, Part Status=Active, partid=7931, price=0.01, Resistance="133 Ohms", series=CRCW, Size / Dimension="0.061\" L x 0.033\" W (1.55mm x 0.85mm)", Supplier 1=DigiKey
R100 R101 R102: library part CRCW0603107RFKEA, "RES SMD 107 OHM 1% 1/10W 0603", Device Package="0603 (1608 Metric)", manufacturer="Vishay Dale", Operating Temperature="-55°C ~ 155°C", Power (Watts)="0.1W, 1/10W", Ratings=AEC-Q200, Supplier Device Package=0603, Supplier Part Number 1=541-107HCT-ND, Temperature Coefficient=±100ppm/°C, Tolerance=±1%, componentlink1description=Datasheet, componentlink1url=http://www.vishay.com/docs/20035/dcrcwe3.pdf, componentlink2description="DigiKey Link", componentlink2url=https://www.digikey.com/en/products/detail/vishay-dale/CRCW0603107RFKEA/1174557, Composition="Thick Film", Features="Automotive AEC-Q200", Height - Seated (Max)="0.020\" (0.50mm)", lastupdated="09/02/2024 20:43:24", Lifecycle Status=Active, Minimum Order=1, Number of Terminations=2, Package / Case="0603 (1608 Metric)", packaging=TapeAndReel, Part Number=CRCW0603107RFKEA, Part Status=Active, partid=7927, price=0.01, Resistance="107 Ohms", series=CRCW, Size / Dimension="0.061\" L x 0.033\" W (1.55mm x 0.85mm)", Supplier 1=DigiKey
R105: library part CRCW06036K98FKEA, "RES SMD 6.98K OHM 1% 1/10W 0603", Device Package="0603 (1608 Metric)", manufacturer="Vishay Dale", Operating Temperature="-55°C ~ 155°C", Power (Watts)="0.1W, 1/10W", Ratings=AEC-Q200, Supplier Device Package=0603, Supplier Part Number 1=541-6.98KHCT-ND, Temperature Coefficient=±100ppm/°C, Tolerance=±1%, componentlink1description=Datasheet, componentlink1url=http://www.vishay.com/docs/20035/dcrcwe3.pdf, componentlink2description="DigiKey Link", componentlink2url=https://www.digikey.com/en/products/detail/vishay-dale/CRCW06036K98FKEA/1174765, Composition="Thick Film", Features="Automotive AEC-Q200", Height - Seated (Max)="0.020\" (0.50mm)", lastupdated="09/02/2024 20:43:25", Lifecycle Status=Active, Minimum Order=1, Number of Terminations=2, Package / Case="0603 (1608 Metric)", packaging=TapeAndReel, Part Number=CRCW06036K98FKEA, Part Status=Active, partid=7857, price=0.01, Resistance="6.98 kOhms", series=CRCW, Size / Dimension="0.061\" L x 0.033\" W (1.55mm x 0.85mm)", Supplier 1=DigiKey
R106: library part HVC0603T1004FET, "RES SMD 1M OHM 1% 1/10W 0603", Device Package="0603 (1608 Metric)", manufacturer=Ohmite, Operating Temperature="-55°C ~ 155°C", Power (Watts)="0.1W, 1/10W", Supplier Device Package=0603, Supplier Part Number 1=HVC0603T1004FETCT-ND, Temperature Coefficient=±100ppm/°C, Tolerance=±1%, componentlink1description=Datasheet, componentlink1url=http://www.ohmite.com/assets/docs/res_hvc.pdf?r=false, componentlink2description="DigiKey Link", componentlink2url=http://digikey.com/product-detail/en/ohmite/HVC0603T1004FET/HVC0603T1004FETCT-ND/4809215, Composition="Thick Film", Features="High Voltage", Height - Seated (Max)="0.022\" (0.55mm)", lastupdated="09/02/2024 20:43:28", Lifecycle Status=Active, Minimum Order=1, Number of Terminations=2, Package / Case="0603 (1608 Metric)", packaging=TapeAndReel, Part Number=HVC0603T1004FET, Part Status=Active, partid=7126, price=0.83, Resistance="1 MOhms", series=HVC, Size / Dimension="0.059\" L x 0.031\" W (1.50mm x 0.80mm)", Supplier 1=DigiKey
U1: "WiFi 802.11a/b/g/n, Bluetooth v5.0 Transceiver Module 2.4GHz Antenna Not Included -", Package="- Espressif Systems", Availability="In Stock", Check_prices=https://www.snapeda.com/parts/ESP32-S3-WROOM-1-N8R2/Espressif+Systems/view-part/?ref=eda, MF="Espressif Systems", MP=ESP32-S3-WROOM-1-N8R2, price=None, Purchase-URL=https://pricing.snapeda.com/search?q=ESP32-S3-WROOM-1-N8R2&ref=eda, SnapEDA_Link=https://www.snapeda.com/parts/ESP32-S3-WROOM-1-N8R2/Espressif+Systems/view-part/?ref=snap
U2: library part CMP-06284-000052-1, "IC HUB CTLR USB 2.0 24QFN", Case/Package=QFN, Max Operating Temperature=70°C, Min Operating Temperature=0°C, Package Quantity=5000, Data Rate=480Mbps, Interface=USB, Lead Free="Lead Free", Number of Pins=24, Number of Ports=2, packaging="Tape and Reel", RoHS Compliant=Yes, series=-
U3: library part CMP-09139-000054-1, "DUAL 40VIN, 3A SILENT SWITCR UMO"
U4 U6: library part CMP-09139-000005-1, "DC DC CONVERTER 0.8-15V", manufacturer="Analog Devices", Max Junction Temp=+125°C, Max Supply Voltage=40V, Min Supply Voltage=3.2V, Nominal Supply Current=3-8uA, Output Current=2uA, Output Voltage=0.8-15V, Package=BGA-28-05-08-1517, Switching Frequency=200-2200kHz, Temperature="-40°C to +125°C", Temperature Range Low=-40°C, Automotive=No, Category=IC, componentlink2description=Datasheet, componentlink2url=https://www.analog.com/media/en/technical-documentation/data-sheets/LTM8063.pdf, Device Class L1="Integrated Circuits (ICs)", Device Class L2="Power Management ICs", Device Class L3="Voltage Regulators - Switching", Digikey Description="DC DC CONVERTER 0.8-15V", Height=2.42mm, Ipc Land Pattern Name=BGA28C80P4X7_625X400X242, Lead Free=Yes, Manufacturer Part Number=LTM8063EY#PBF, Mouser Description="Module DC-DC 1-OUT 0.8V to 15V 2A Automotive 28-Pin BGA Tray", Number Of Outputs=1, Octopart=https://octopart.com/ltm8063ey%23pbf-analog+devices-88947122, Output Type=AdjustableProgrammable, RoHS=TRUE, Standoff Height=0.3mm, Switching Topology=Buck, Temperature Range High=+125°C
U5: "1-A, low-IQ, high-accuracy, adjustable ultra-low-dropout voltage regulator with power good & enable", Package="WSON-6 Texas Instruments", Check_prices=https://www.snapeda.com/parts/TPS74601PDRVT/Texas+Instruments/view-part/?ref=eda, MF="Texas Instruments", MP=TPS74601PDRVT, SnapEDA_Link=https://www.snapeda.com/parts/TPS74601PDRVT/Texas+Instruments/view-part/?ref=snap
U7: library part CMP-09139-000109-1, "DC DC CONVERTER +/-2.5 TO +/-24V", RoHS Compliant=No
U8: library part DS4424, "Two-/Four-Channel, IÂ²C, 7-Bit Sink/Source Current DAC", Manufacturer_Name="Analog Devices Inc", Manufacturer_Part_Number=ds4424n+, Copyright="Copyright (C) 2026 Ultra Librarian. All rights reserved.", RefDes=RefDes, Type=Type
U9: "Quad-Channel, Software Configurable Input and Output with HART Modem", Manufacturer_Name="Analog Devices Inc", Copyright="Copyright (C) 2025 Ultra Librarian. All rights reserved.", Manufacturer_Part_Number=AD74416HBCPZ, RefDes=RefDes, Type=Type
U10 U11 U16 U17 U23: "0.56Omh On Resistance High Density Octal SPST Switch", Manufacturer_Name="Analog Devices Inc", Copyright="Copyright (C) 2025 Ultra Librarian. All rights reserved.", Manufacturer_Part_Number=ADGS2414DBCCZ, RefDes=RefDes, Type=Type
U12 U14 U18 U19: library part PTPS16410DRCR, "2.7-V to 40-V, 152-mOmh, 1.8-A eFuse with output power limiting 10-VSON -40 to 125", Manufacturer_Name="Texas Instruments", Copyright="Copyright (C) 2026 Ultra Librarian. All rights reserved.", Manufacturer_Part_Number=PTPS16410DRCR, RefDes=RefDes, Type=TYPE
U13 U15: library part CMP-2000-04956-2, "IC TRNSLTR BIDIRECTIONAL 20TSSOP", Case/Package=TSSOP, High Level Output Current=-50mA, Low Level Output Current=50mA, Max Operating Temperature=85°C, Max Supply Voltage=5.5V, Min Operating Temperature=-40°C, Min Supply Voltage=1.2V, Nominal Supply Current=8uA, Output Current=620uA, Package Quantity=1, Quiescent Current=3uA, Contact Plating=Gold, Data Rate=60Mbps, Height=1.15mm, Lead Free="Lead Free", Length=6.5mm, Logic Function=Translator, Mount="Surface Mount", Number of Bits=8, Number Of Channels=8, Number of Inputs=8, Number of Pins=20, Output Type=Voltage, packaging="Tape and Reel", Propagation Delay=4.8ns, Radiation Hardening=No, REACH SVHC="No SVHC", Rise Time=6.3ns, RoHS Compliant=Yes, series=-, Supply Current=8uA, Termination=SMD/SMT, Turn-On Delay Time=312ns, Weight=0.002716oz, Width=4.4mm
U20: library part CMP-10112-000026-1, "IC I/O EXPANDER I2C 24HWQFN", Frequency=400kHz, Max Frequency=100kHz, Max Operating Temperature=85°C, Min Operating Temperature=-40°C, Operating Supply Voltage=5.5V, Package Quantity=1, Power Dissipation=200mW, Contact Plating=Gold, Interface=I2C, Mount="Surface Mount", Number of I/Os=16, Number of Pins=24, packaging="Tape and Reel", RoHS Compliant=Yes, series=-
U21: library part CMP-0784-00254-1, "Ultralow Noise, High Accuracy Voltage Reference, 2.5 V Output, 3 to 15 V Supply, Industrial, 8-pin SOIC (R-8), Tube", manufacturer="Analog Devices", Operating Temp Range="-40 to 125 degC", Code_JEDEC=MS-012-AA, componentlink1description="Manufacturer URL", componentlink1url=http://www.analog.com/en/index.html, componentlink2description=Datasheet, componentlink2url=http://www.analog.com/static/imported-files/data_sheets/ADR4520_4525_4530_4533_4540_4550.pdf, ComponentLink3Description="Package Specification", ComponentLink3URL=http://www.analog.com/static/imported-files/packages/PKG_PDF/SOIC_Narrow%20(R)/R_8.pdf, ComponentLink4Description="URL Link1", ComponentLink4URL="Product URL:http://www.analog.com/en/special-linear-functions/voltage-references/adr4525/products/product.html", DatasheetVersion="Rev. 0", Max V Supply (V)=15, Min V Supply (V)=3, Mounting Technology="Surface Mount", PackageDescription="8-Pin Standard Small Outline Package, Body 4.9 x 3.9 mm, Pitch 1.27 mm", PackageReference=R-8, PackageVersion="060506-A, 06/2006", Packing=Tube, PartNumber=ADR4525BRZ, Ref Out TC (ppm/C)=2, Vout=2.5V
Y1: library part CMP-27762-001449-1, "Crystal 24MHz ±10ppm 8pF SMD-4 2mm x 1.6mm", Case/Package=SMD/SMT, ESR (Equivalent Series Resistance)=100R, Frequency=24MHz, Frequency Stability=10ppm, Load Capacitance=8pF, Max Operating Temperature=70°C, Min Operating Temperature=-20°C, Frequency Tolerance=10ppm, Mount="Surface Mount", packaging="Tape and Reel", RoHS Compliant=Yes

## Free pads (board coordinates)
  round 5 hole 3.3 mask+0: 1(4,76) 2(4,4) 3(106,4) 4(106,76)
  round 0.5 smd mask+0: 5(53.8,58.3) 6(44.5,56.5) 7(33.9,33.9) 8(7.7,65.6) 9(18.3,67.9) 10(44.5,77.5) 11(23.4,55) 12(34.5,56)

## Via types
v1: diameter 0.6, hole 0.35, Top Layer to Bottom Layer, tented both sides, 608 vias
v2: diameter 0.5, hole 0.25, Top Layer to Bottom Layer, tented both sides, 555 vias
v3: diameter 0.45, hole 0.25, Top Layer to Bottom Layer, tented both sides, 6 vias

## Nets (pads, with @x,y where several pads share a name; then routed paths per layer and width w, separated by ;. In a path a pad name is that pad's centre, name@x,y a point inside that pad or via, vN(x,y) a via of type N, cw(c..) or ccw(c..) an arc to the next point about the centre after c; other vN are vias at no path point)
2V5_REF: C44.2 C79.2 C80.2 pad.6 U9.17 U21.6 | length 30.8
  Top Layer w0.2: v2(43.7,39.6) 43.7,39.519 43.8,39.419 43.8,38.225 C44.2@44.025,38 45,38 45.2,37.8 45.2,36.8 46.999,35.001 47.528,35.001 U9.17@47.53,35 ; pad.6@44.5,56.5 v2(45.1,57.1) 45.1,61.835 U21.6@45.165,61.9
  Inner Layer 4 w0.2: v2(43.7,39.6) 43.7,55.7 v2(45.1,57.1)
3V3_ADJ: C23.2 C24.2 C63.2 C67.2 R22.2 U5.1 U13.19 U15.19 U23.19 | length 52.7
  Top Layer w0.2: U23.19@65.9,11.509 65.901,11.508 65.901,10.801 v2(65.902,10.8) ; v1(75.5,28.75) 75.5,28.669 75.425,28.594 C63.2@75.425,27.25 75.25,27.075 75.25,25.5 75.475,25.275 U15.19@76.275,25.275 ; U13.19@76.525,58.525 75.475,58.525 75.25,58.75 75.25,59.5 75.6,59.85 75.6,60.175 C67.2@75.925,60.5 v1(77.25,60.5)
  Top Layer w0.25: U5.1@56.815,72.068 56.863,72.019 57.281,72.019 58,71.3 58.075,71.3 58.425,70.95 C24.2@58.425,70.9 58.683,71.158 58.683,71.583 59.389,72.289 59.389,72.718 R22.2@59.714,73.043
  Inner Layer 4 w0.2: v2(65.902,10.8) 65.902,13.002 68,15.1 v2(68,28.9)
  Inner Layer 4 w0.6: v1(55.9,60.1) v1(55.9,61.1) v1(55.9,62.15) v1(55.9,63.1) 55.9,65.6 57.3,67 v1(57.3,67.6) v1(57.3,68.7) v1(57.3,69.8) v1(57.3,70.9)
  Bottom Layer w0.2: v2(68,28.9) 68.057,28.957 68.248,28.957 68.267,28.977 75.383,28.977 75.383,28.975 75.5,28.858 v1(75.5,28.75)
3V3_BUCK: C2.2 C3.2 C5.2 C6.2 C16.2 C17.2 C30.2 C31.2 C36.1 C39.1 C61.2 C66.2 C75.2 C76.2 pad.12 R1.2 R2.2 R3.2 R5.1 R6.1 R7.1 R15.1 R16.1 R56.1 R63.1 R64.1 R70.1 R78.1 R79.1 R88.1 R91.1 R94.1 R96.2 R111.2 R112.2 U1.2 U2.1 U2.9 U2.16 U2.18 U3.F6 U3.F7 U3.G6 U3.G7 U8.13 U9.62 U13.2 U15.2 U20.21 | length 83